# EAGLE board gauge_node_r4 (EAGLE 6.5.0)
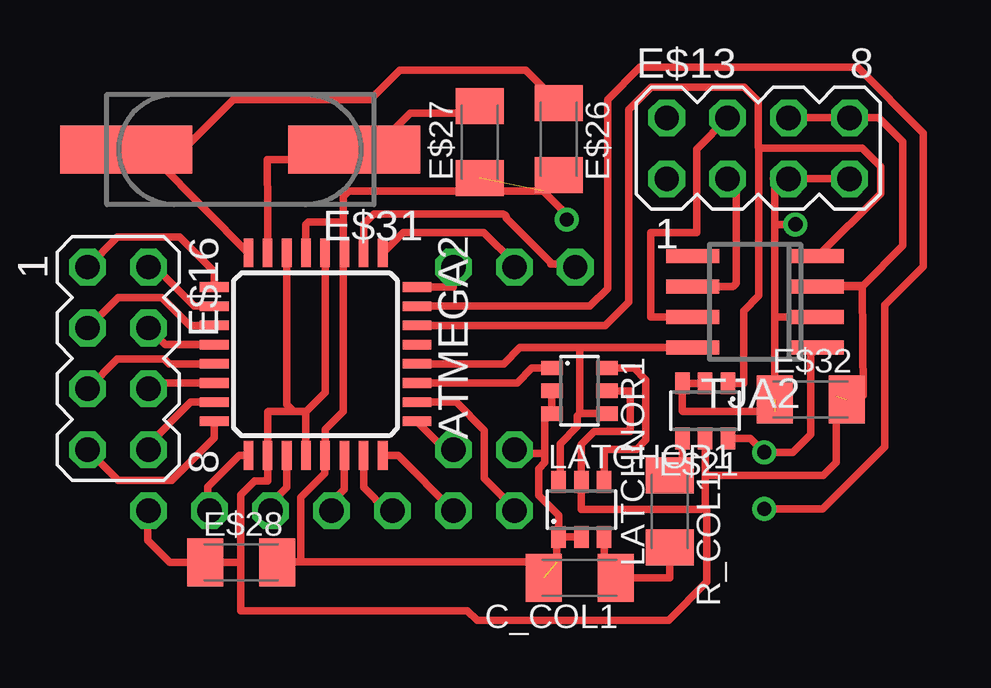
[diagram p0: board, top side]
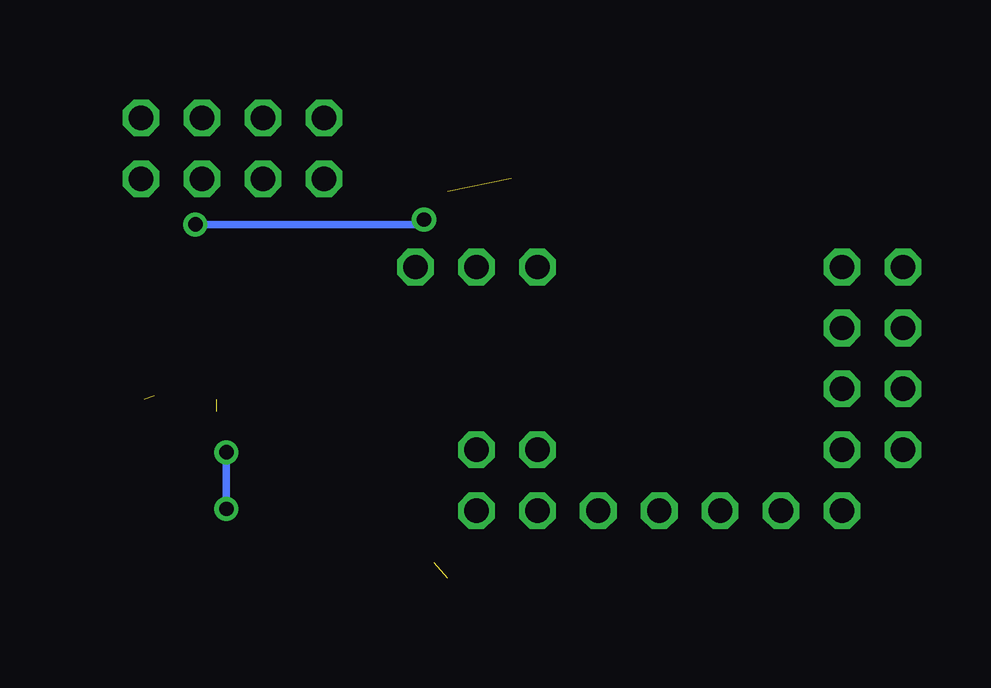
[diagram p1: board, bottom side, seen from below]

No outline drawn. Coordinates in mm, seen from the top.
Copper layers (1*16): Top 0.035mm / dielectric 1.5mm / Bottom 0.035mm
Design rules "default *": minimum track width 10mil, minimum drill 24mil, track to track 16mil, track to pad 16mil, pad to pad 16mil, via to via 16mil, smd to smd 16mil, copper to edge 40mil, drill to drill 8mil, minimum pad ring 10mil, minimum via ring 8mil, stop-mask expansion 4mil, vias tented up to drill 0mil, thermal gap 10mil

## Footprints (pad centres in the part's own frame; a part is rotated, then mirrored left to right if it is on the bottom)
LQFP32-7X7 = smd 1.2 x 0.4: 1 -4.225,2.8; 2 -4.225,2; 3 -4.225,1.2; 4 -4.225,0.4; 5 -4.225,-0.4; 6 -4.225,-1.2; 7 -4.225,-2; 8 -4.225,-2.8; 17 4.225,-2.8; 18 4.225,-2; 19 4.225,-1.2; 20 4.225,-0.4; 21 4.225,0.4; 22 4.225,1.2; 23 4.225,2; 24 4.225,2.8 | smd 0.4 x 1.2: 9 -2.8,-4.225; 10 -2,-4.225; 11 -1.2,-4.225; 12 -0.4,-4.225; 13 0.4,-4.225; 14 1.2,-4.225; 15 2,-4.225; 16 2.8,-4.225; 25 2.8,4.225; 26 2,4.225; 27 1.2,4.225; 28 0.4,4.225; 29 -0.4,4.225; 30 -1.2,4.225; 31 -2,4.225; 32 -2.8,4.225
C1206K = smd 1.5 x 2: 1 -1.5,0; 2 1.5,0
OCTO = drill 1.016 octagon: 3 0,0
MA04-2 = drill 1.016 octagon: 1 -3.81,-1.27; 2 -3.81,1.27; 3 -1.27,-1.27; 4 -1.27,1.27; 5 1.27,-1.27; 6 1.27,1.27; 7 3.81,-1.27; 8 3.81,1.27
SOT23-6 = smd 0.6 x 0.9: 1 -0.95,-1.15; 2 0,-1.15; 3 0.95,-1.15; 4 0.95,1.15; 5 0,1.15; 6 -0.95,1.15
CSM-7X-DU = smd 5.5 x 2: 1 -4.75,0; 2 4.75,0
SO8 = smd 0.6 x 2.2: 1 -1.905,-2.6; 2 -0.635,-2.6; 3 0.635,-2.6; 4 1.905,-2.6; 5 1.905,2.6; 6 0.635,2.6; 7 -0.635,2.6; 8 -1.905,2.6

## Placement (x,y rotation side)
ATMEGA2  [LQFP32-7X7]  -7.95,15.77 270 top
C_COL1  [C1206K]  3.05,6.45 180 top
E$1  [OCTO]  -2.21,19.41 90 top
E$2  [OCTO]  0.33,11.79 180 top
E$3  [OCTO]  -14.91,9.25 180 top
E$6  [OCTO]  0.33,9.25 180 top
E$7  [OCTO]  -2.21,11.79 180 top
E$8  [OCTO]  -2.21,9.25 180 top
E$9  [OCTO]  0.33,19.41 90 top
E$13  [MA04-2]  10.49,24.36 0 top
E$16  [MA04-2]  -16.18,15.6 270 top
E$19  [OCTO]  -2.21,9.25 180 top
E$20  [OCTO]  -4.75,9.25 180 top
E$21  [SOT23-6]  8.28,13.41 180 top
E$22  [OCTO]  -7.29,9.25 180 top
E$23  [OCTO]  -9.83,9.25 180 top
E$24  [OCTO]  -12.37,9.25 180 top
E$25  [OCTO]  2.87,19.41 90 top
E$26  [C1206K]  2.18,24.74 270 top
E$27  [C1206K]  -1.12,24.61 90 top
E$28  [C1206K]  -11.05,7.09 0 top
E$31  [CSM-7X-DU]  -11.1,24.31 180 top
E$32  [C1206K]  12.67,13.89 0 top
LATCHNOR1  [SOT23-6]  3.05,14.25 270 top
LATCHOR1  [SOT23-6]  3.12,9.3 0 top
R_COL1  [C1206K]  6.81,9.22 270 top
TJA2  [SO8]  10.36,17.96 90 top

## Library data of the parts
ATMEGA2 = ftdichip
C_COL1 E$26-E$28 E$32 R_COL1 = rcl
E$1-E$3 E$6-E$9 E$13 E$16 E$19 E$20 E$22-E$25 = con-lstb
E$21 LATCHNOR1 LATCHOR1 = linear
E$31 = crystal
TJA2 = ref-packages-longpad

## Nets
COLLISION1: C_COL1.1 LATCHOR1.3 R_COL1.2
GND1: ATMEGA2.3 ATMEGA2.5 ATMEGA2.21 C_COL1.2 E$2.3 E$13.5 E$13.7 E$21.2 E$21.3 E$26.2 E$27.1 E$28.2 E$32.1 LATCHNOR1.2 LATCHNOR1.3 LATCHOR1.1 LATCHOR1.2 TJA2.2
S$1: E$13.3 TJA2.6
S$2: E$13.4 TJA2.7
S$3: ATMEGA2.32 E$1.3
S$4: ATMEGA2.2 E$25.3
S$5: ATMEGA2.26 E$6.3
S$7: ATMEGA2.29
S$8: ATMEGA2.27 LATCHNOR1.1
S$71: LATCHNOR1.6 LATCHOR1.4
S$72: E$21.4 R_COL1.1
S$73: ATMEGA2.31 E$21.6 TJA2.1
S$74: ATMEGA2.30 E$21.1 TJA2.4
S$75: ATMEGA2.8 E$26.1 E$31.2
S$76: ATMEGA2.7 E$27.2 E$31.1
S$78: ATMEGA2.1 E$9.3
S$83: ATMEGA2.25 E$7.3
S$84: ATMEGA2.24 E$8.3
S$85: ATMEGA2.23 E$20.3
S$86: ATMEGA2.22 E$22.3
S$87: ATMEGA2.19 E$23.3
S$88: ATMEGA2.17 E$24.3
S$90: ATMEGA2.16 E$16.7
S$91: ATMEGA2.15 E$16.8
S$92: ATMEGA2.14 E$16.6
S$93: ATMEGA2.13 E$16.5
S$94: ATMEGA2.12 E$16.4
S$95: ATMEGA2.11 E$16.3
S$96: ATMEGA2.10 E$16.2
S$97: ATMEGA2.9 E$16.1
SILENT1: ATMEGA2.28 LATCHNOR1.4 LATCHOR1.6 TJA2.8
VCC1: ATMEGA2.4 ATMEGA2.6 ATMEGA2.18 ATMEGA2.20 E$3.3 E$13.6 E$13.8 E$21.5 E$28.1 E$32.2 LATCHNOR1.5 LATCHOR1.5 TJA2.3

## Tracks (layer width: path | path; a pad name or v marks a point on that pad's centre or on a via)
COLLISION1
  Top 0.305: 6.78,7.51 R_COL1.2 6.81,6.45 C_COL1.1 4.07,6.92 LATCHOR1.3
GND1  (via drill 0.6 pad 0.25)  (3 unrouted)
  Top 0.305: -6.81,19.94 -6.81,13.39 -7.55,12.64 ATMEGA2.21 -7.57,11.53 -7.57,10.79 -8.56,9.8 -8.56,7.16 -8.61,7.11 | -6.81,19.94 ATMEGA2.3 | E$21.2 E$21.3 7.33,13.4 7.34,13.39 11.18,13.39 11.18,17.32 | 1.96,14.19 LATCHNOR1.2 LATCHNOR1.3 1.6,13 1.6,11.63 | -6.81,19.94 -6.81,21.16 | -6.81,21.16 -6.93,21.29 -8.26,21.29 -8.36,21.18 ATMEGA2.5 | E$13.7 E$13.5 11.18,23.09 | TJA2.2 11.18,17.32 | 11.12,23.09 11.18,23.09 | 11.18,17.32 11.18,21.18 | 11.18,21.18 11.18,23.09 | v12.04,21.18 11.18,21.18 | LATCHOR1.2 LATCHOR1.1 | LATCHOR1.1 2.17,9.05 1.35,9.88 1.35,11 1.6,11.25 1.6,11.63 | -8.61,7.11 0.89,7.11 C_COL1.2 | -8.61,7.11 -9.47,7.11 -9.5,7.09 E$28.2 | LATCHOR1.1 2.11,8.15 2.11,7.09 | -6.81,21.16 -6.81,22.35 -6.58,22.58 1.52,22.58 | 1.52,22.58 E$26.2 | 1.52,22.58 2.52,21.59 v2.52,21.39 | E$2.3 0.48,11.63 1.6,11.63
  Bottom 0.305: 12.04,21.01 v12.04,21.18 2.72,21.18 v2.52,21.39
S$1
  Top 0.305: 9.55,22.76 E$13.3 9.58,22.73 9.58,18.8 arc-90 9.37,18.59 TJA2.6
S$2
  Top 0.305: E$13.4 7.92,24.33 7.92,20.85 6.02,20.85 6.02,17.32 TJA2.7
S$3
  Top 0.305: ATMEGA2.32 -2.21,18.57 E$1.3
S$4
  Top 0.305: ATMEGA2.2 -5.95,21.2 -5.54,21.61 -0.18,21.61 arc-90 0,21.44 1.85,19.58 1.85,19.53 2.74,19.53 E$25.3
S$5
  Top 0.305: E$6.3 0.33,9.35 -0.91,10.59 -0.91,12.6 -2.09,13.77 ATMEGA2.26
S$7
  Top 0.305: ATMEGA2.29 -3.72,16.18
S$8
  Top 0.305: 1.76,15.17 1.87,15.17 LATCHNOR1.1 1.89,15.19 1.07,15.19 0.45,14.57 ATMEGA2.27
S$71
  Top 0.305: LATCHOR1.4 4.07,11.69 4.19,11.81 5.44,11.81 5.82,12.19 5.82,14.71 5.33,15.19 LATCHNOR1.6
S$72
  Top 0.305: R_COL1.1 7.33,10.72 E$21.4
S$73  (via drill 0.6 pad 0.25)
  Top 0.305: ATMEGA2.31 -3.71,17.75 | ATMEGA2.31 -3.73,17.8 | ATMEGA2.31 3.47,17.77 4.22,18.52 4.22,26.39 5.56,27.74 14.63,27.74 17.37,24.99 17.37,19.43 15.77,17.83 15.77,11.91 13.18,9.32 v10.74,9.32 | TJA2.1 12.68,15.76 12.68,12.42 11.94,11.68 v10.74,11.68 10.17,12.26 E$21.6
  Bottom 0.305: v10.74,9.32 v10.74,11.68
S$74
  Top 0.305: ATMEGA2.30 -3.72,16.97 | ATMEGA2.30 -3.71,16.99 | E$21.1 9.88,14.56 9.88,17.58 10.52,18.21 10.52,24.33 10.54,24.36 | ATMEGA2.30 4.12,16.97 5.11,17.96 5.11,25.96 6.04,26.9 9.91,26.9 10.49,26.31 10.49,24.41 10.54,24.36 | 13.56,19.86 TJA2.4 12.98,19.86 15.6,22.48 15.6,23.6 14.83,24.36 10.54,24.36
S$75
  Top 0.305: ATMEGA2.8 -14.53,23.8 -15.75,23.8 | -15.75,23.8 E$31.2 -13.46,24.31 -11.38,26.39 -5.66,26.39 -4.45,27.61 0.81,27.61 E$26.1 | -13.89,23.9 -14.61,23.9 -15.75,23.8
S$76
  Top 0.305: ATMEGA2.7 -9.95,21.7 -9.96,23.88 -7.92,23.88 E$31.1 -5.54,24.31 -4.01,25.83 -1.4,25.83 E$27.2
S$78
  Top 0.305: ATMEGA2.1 -4.29,20.85 -0.94,20.85 0.33,19.58 E$9.3
S$83
  Top 0.305: E$7.3 -2.54,11.79 ATMEGA2.25
S$84
  Top 0.305: E$8.3 -4.51,11.55 ATMEGA2.24
S$85
  Top 0.305: E$20.3 -4.98,9.25 -5.94,10.21 ATMEGA2.23
S$86
  Top 0.305: E$22.3 -7.29,9.6 -6.76,10.13 ATMEGA2.22
S$87
  Top 0.305: E$23.3 -9.83,9.53 -9.14,10.21 ATMEGA2.19
S$88
  Top 0.305: ATMEGA2.17 -11.13,11.55 -12.45,10.24 -12.45,9.32 E$24.3
S$90
  Top 0.305: ATMEGA2.16 -12.18,12.29 -13.95,10.52 -16.18,10.52 E$16.7
S$91
  Top 0.305: E$16.8 -14.91,12.01 -13.15,13.77 ATMEGA2.15
S$92
  Top 0.305: ATMEGA2.14 -14.66,14.57 E$16.6
S$93
  Top 0.305: ATMEGA2.13 -14.05,15.37 -14.25,15.57 -16.2,15.57 E$16.5
S$94
  Top 0.305: ATMEGA2.12 -14.22,16.17 E$16.4
S$95
  Top 0.305: ATMEGA2.11 -13.19,16.97 -14.35,18.14 -16.18,18.14 E$16.3
S$96
  Top 0.305: ATMEGA2.10 -13,17.77 -14.33,19.1 -14.61,19.1 E$16.2
S$97
  Top 0.305: ATMEGA2.9 -12.18,19.21 -13.61,20.65 -16.2,20.65 E$16.1
SILENT1
  Top 0.305: LATCHOR1.6 2.2,10.47 2.23,10.47 2.23,12.04 2.95,12.75 2.95,13.2 3.05,13.3 | LATCHNOR1.4 3.05,13.3 | TJA2.8 3.05,16.05 | 3.05,16.05 3.05,13.3 | 3.05,16.05 0.56,16.05 -0.12,15.37 ATMEGA2.28
VCC1  (1 unrouted)
  Top 0.305: -8.35,13.39 -8.87,13.39 | -8.87,13.39 -9.93,13.39 -9.95,13.37 ATMEGA2.18 -9.95,10.49 -10.49,10.49 -11.07,9.91 -11.07,7.09 | ATMEGA2.4 -7.55,14.17 -8.33,13.39 -8.35,13.39 | ATMEGA2.6 -9.15,13.67 -8.87,13.39 | ATMEGA2.20 -8.35,13.39 | 4.22,14.22 LATCHNOR1.5 5.16,14.25 5.16,12.55 3.66,12.55 3.12,12.01 LATCHOR1.5 3.12,9.3 8.13,9.3 8.28,9.45 | E$13.8 E$13.6 | 14.3,25.6 E$13.8 | E$13.8 15.52,25.63 16.51,24.64 16.51,20.3 14.86,18.64 13.01,18.64 TJA2.3 14.83,18.59 14.86,14.05 13.74,14.02 13.74,11.27 13.2,10.72 8.28,10.72 | E$21.5 8.28,10.72 | 8.28,10.72 8.28,9.45 | -11.07,7.09 -11.07,5.08 -1.63,5.08 -1.22,4.67 6.76,4.67 8.36,6.27 8.36,9.37 8.28,9.45 | -11.07,7.09 E$28.1 -14.02,7.09 -14.94,8 -14.94,9.22 E$3.3